# Altium PCB PCB1.PcbDoc
Units mil, origin at the board's own origin, x right, y up, seen from the top; angles counter-clockwise.
Board outline 10000 x 8000 mil, 2 copper layers (Top Layer, Bottom Layer); 30 components, 41 nets, 140 pads, 2 vias.
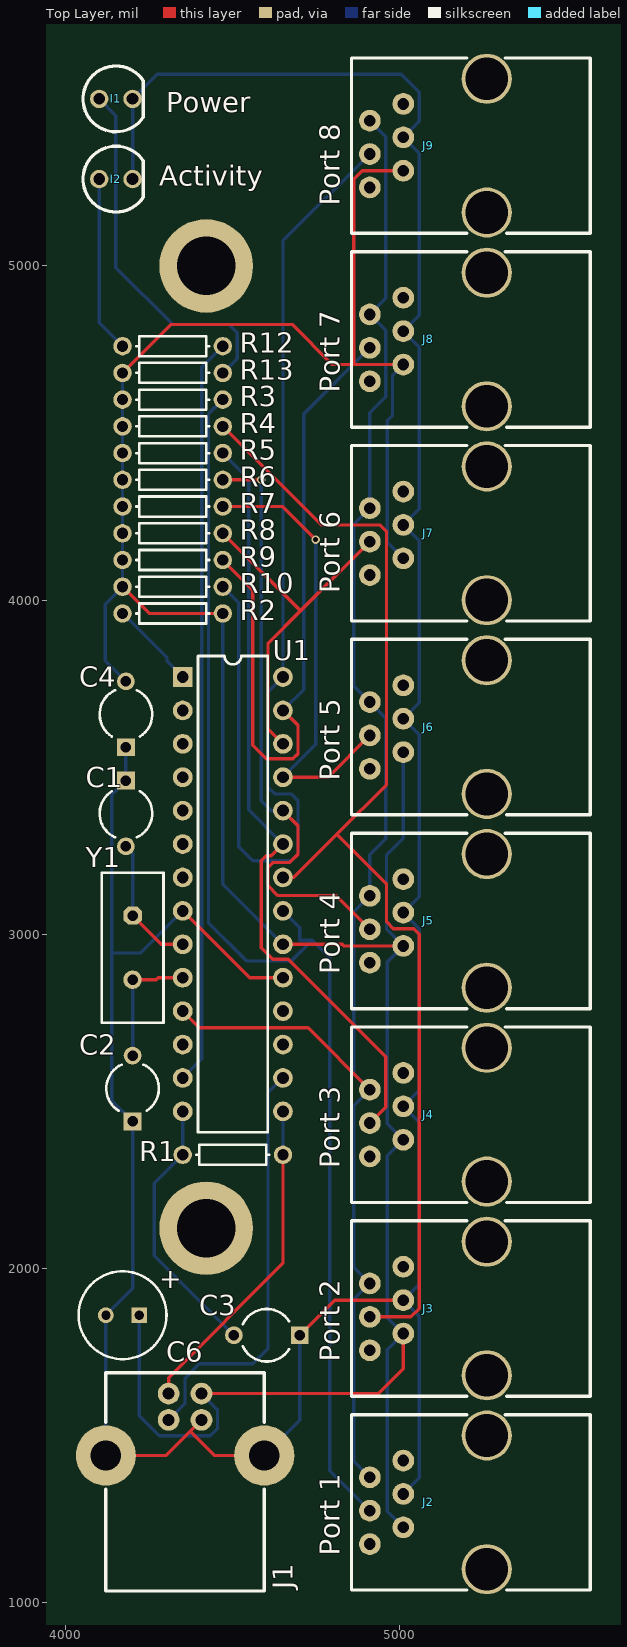
[diagram p0: Top Layer view]
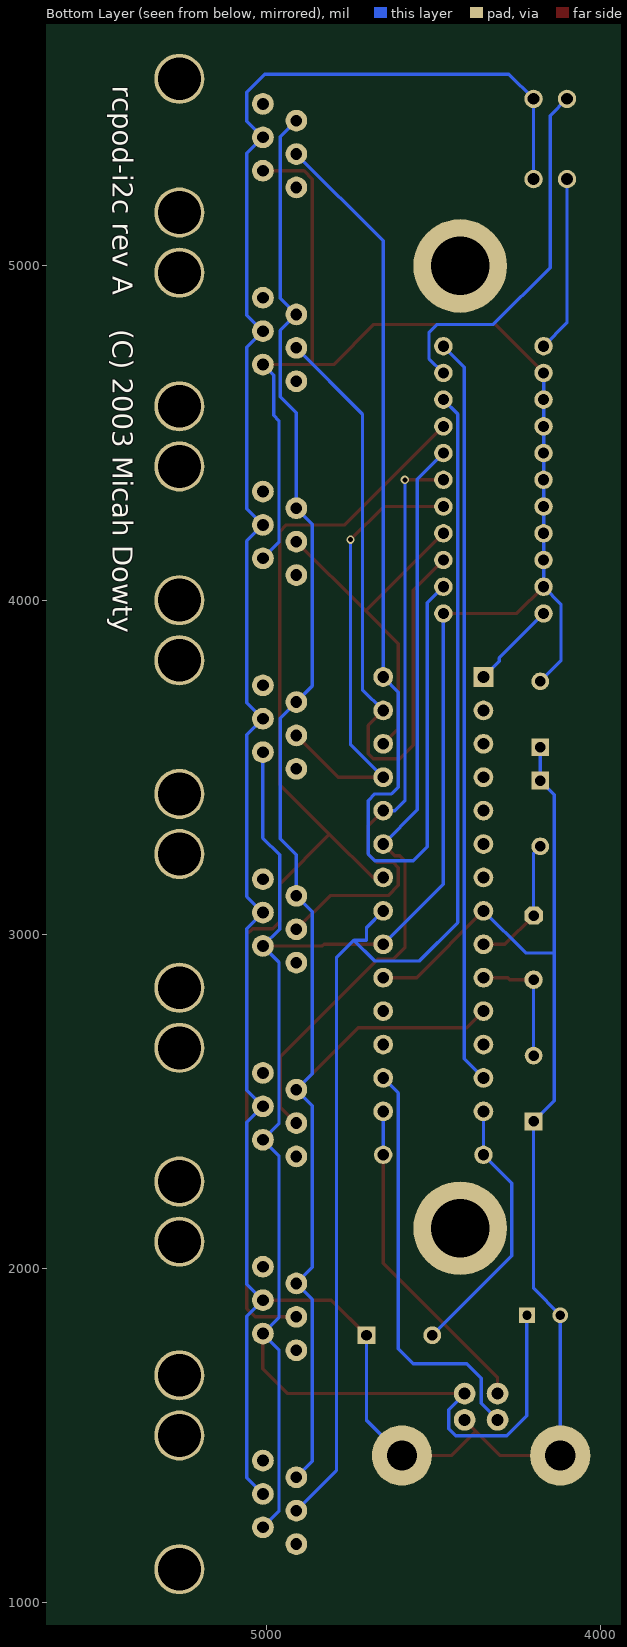
[diagram p1: Bottom Layer view, seen from below]

## Layer stack, top to bottom
Top Layer: signal copper 1.4
Dielectric: dielectric 12.6, FR-4, Dk 4.8
Bottom Layer: signal copper 1.4

## Board outline
0,0 10000,0 10000,8000 0,8000

## Design rules (kind name [scope] priority, off if disabled: settings)
Clearance [All] p1: gap=10
ComponentClearance [All] p1: gap=10 collisioncheckmode=0
HoleSize [All] p1: absolutevalues=TRUE maxlimit=200 minlimit=1 maxpercent=80.000 minpercent=20.000
PolygonConnect [All] p1: connectstyle=Relief reliefconductorwidth=10 reliefentries=4 polygonreliefangle="90 Angle"
RoomDefinition Sheet1 [InComponentClass('Sheet1')] p1: confinementstyle=ConfineIn formatcopy=TRUE outline 4000,1000 5600,1000 5600,5660 4000,5660
RoutingCorners [All] p1: cornerstyle=Round minsetback=100 maxsetback=100
RoutingLayers [All] p1: top layer=Horizontal bottom layer=Vertical
RoutingVias [All] p1: holewidth=15 width=25 viastyle="Through Hole" minholewidth=15 minwidth=25 maxholewidth=15 maxwidth=25
SolderMaskExpansion [All] p1: expansion=4
TestPointUsage [All] p1: valid=0 allowmultiple=FALSE
Testpoint [All] p1: side=15 testpointundercomponent=TRUE minsize=40 maxsize=100 preferedsize=60 minholesize=0 maxholesize=40 preferedholesize=32 testpointgrid=1 style=1023 order=1234567890
Width [All] p1: maxlimit=30 minlimit=10 preferedwidth=10 minimp=50.000000 maximp=50.000000 favimp=50.000000
14 further rules are at their usual default settings.

## Components (designator, comment, footprint, x,y, rotation, side; value= is the part's Value field where it differs from the comment)
C1 "Cap2" CAPR5-4X5 4180,3460 r270 top
C2 "Cap2" CAPR5-4X5 4200,2440 r90 top
C3 "" CAPR5-4X5 4700,1800 r180 top
C4 "" CAPR5-4X5 4180,3560 r90 top
C6 "Cap Pol1" CAP-EE-1 4320,1860 r0 top
I1 "Power" LED5MM 4100,5500 r0 top
I2 "Activity" LED5MM 4100,5260 r0 top
J1 "USB Type B" USB-TYPEB 4120,1440 r0 top
J2 "Port 1" RJ11 5260,1100 r90 top
J3 "Port 2" RJ11 5260,1680 r90 top
J4 "Port 3" RJ11 5260,2260 r90 top
J5 "Port 4" RJ11 5260,2840 r90 top
J6 "Port 5" RJ11 5260,3420 r90 top
J7 "Port 6" RJ11 5260,4000 r90 top
J8 "Port 7" RJ11 5260,4580 r90 top
J9 "Port 8" RJ11 5260,5160 r90 top
R1 "Res1" AXIAL-0.3 4500,2340 r0 top
R2 "Res1" AXIAL-0.3 4320,3960 r0 top
R3 "Res1" AXIAL-0.3 4320,4600 r0 top
R4 "Res1" AXIAL-0.3 4320,4520 r0 top
R5 "Res1" AXIAL-0.3 4320,4440 r0 top
R6 "Res1" AXIAL-0.3 4320,4360 r0 top
R7 "Res1" AXIAL-0.3 4320,4280 r0 top
R8 "Res1" AXIAL-0.3 4320,4200 r0 top
R9 "Res1" AXIAL-0.3 4320,4120 r0 top
R10 "Res1" AXIAL-0.3 4320,4040 r0 top
R12 "Res1" AXIAL-0.3 4320,4760 r180 top
R13 "Res1" AXIAL-0.3 4320,4680 r0 top
U1 "PIC16C745" DIP-28 4500,3120 r270 top
Y1 "6 MHz" BCY-W2/E4.7 4200,2960 r270 top

## Footprints (in the part's own frame and the unit in brackets; to place one, negate y for a bottom-side part, rotate by r counter-clockwise, add the part's x,y. Pads: shape width x height; smd on the part's side, far side on the other; paste and mask are expansions set on the pad)
AXIAL-0.3 [mm]
  round 1.4 hole 0.85: 1(-3.81,0) 2(3.81,0)
  silkscreen extent -2.77,-0.76 2.77,0.76
BCY-W2/E4.7 [mm]
  oct 1.4x1.4 hole 0.8: 1(-2.44,0)
  round 1.4 hole 0.8: 2(2.44,0)
  silkscreen extent -5.7,-2.35 5.7,2.35
CAP-EE-1 [mm]
  rect 1.2x1.2 hole 0.7: 1(-2.54,0)
  round 1.2 hole 0.7: 2(-5.08,0)
  silkscreen extent -7.15,-3.34 -0.47,3.34
CAPR5-4X5 [mm]
  rect 1.35x1.35 hole 0.8: 1(0,0)
  round 1.35 hole 0.8: 2(5,0)
  silkscreen extent 0.81,-2 4.32,2
DIP-28 [mm]
  rect 1.5x1.5 hole 0.9: 1(-16.51,-3.81)
  round 1.5 hole 0.9: 2(-13.97,-3.81) 3(-11.43,-3.81) 4(-8.89,-3.81) 5(-6.35,-3.81) 6(-3.81,-3.81) 7(-1.27,-3.81) 8(1.27,-3.81) 9(3.81,-3.81) 10(6.35,-3.81) 11(8.89,-3.81) 12(11.43,-3.81) 13(13.97,-3.81) 14(16.51,-3.81) 15(16.51,3.81) 16(13.97,3.81) 17(11.43,3.81) 18(8.89,3.81) 19(6.35,3.81) 20(3.81,3.81) 21(1.27,3.81) 22(-1.27,3.81) 23(-3.81,3.81) 24(-6.35,3.81) 25(-8.89,3.81) 26(-11.43,3.81) 27(-13.97,3.81) 28(-16.51,3.81)
  silkscreen extent -18.1,-2.65 18.1,2.65
LED5MM [mil]
  round 55 hole 35: 1(0,0) 2(100,0)
  silkscreen extent -48,-98 132,98
RJ11 [mil]
  round 150 hole 128: 0(0,0) 0(400,0)
  round 65 hole 35: 1(75,350) 2(125,250) 3(175,350) 4(225,250) 5(275,350) 6(325,250)
  silkscreen extent -63,-310 462,405
USB-TYPEB [mil]
  round 65 hole 36.22: 1(286.22,185.43) 2(187.8,185.43) 3(187.8,106.69) 4(286.22,106.69)
  round 180 hole 90.55: 5(0,0) 5(474.02,0)
  silkscreen extent 0,-406 474,248

## Part data
C1 C2: "Capacitor"
C3 C4: library part Cap2, "Capacitor"
C6: "Polarized Capacitor (Radial)"
I1 I2: library part LED0, "Typical INFRARED GaAs LED"
J1: "Header, 4-Pin"
J2 J3 J4 J5 J6 J7 J8 J9: library part "Header 6", "Header, 6-Pin"
R1 R2 R3 R4 R5 R6 R7 R8 R9 R10 R12 R13: "Resistor"
U1: "EPROM-Based 8-Bit CMOS Microcontroller with USB"
Y1: library part XTAL, "Crystal Oscillator"

## Free pads (board coordinates)
  round 280 hole 175: 0(4420,2120) 0(4420,5000)

## Via types
v1: diameter 25, hole 15, Top Layer to Bottom Layer, 2 vias

## Nets (pads, with @x,y where several pads share a name; then routed paths per layer and width w, separated by ;. In a path a pad name is that pad's centre, name@x,y a point inside that pad or via, vN(x,y) a via of type N, cw(c..) or ccw(c..) an arc to the next point about the centre after c; other vN are vias at no path point)
GND: C1.1 C2.1 C3.1 C4.1 C6.2 I1.2 I2.2 J1.4 J1.5 J2.4 J3.4 J4.4 J5.4 J6.4 J7.4 J8.4 J9.4 U1.8 U1.19 | length 9826.8
  Top Layer w10: J1.5@4120,1440 4299.53,1440 4372.87,1513.35 ; U1.8 4550,2870 U1.19 ; J1.4 4372.87,1513.35 ; J1.5@4594.02,1440 4446.22,1440 4372.87,1513.35 ; C3.1 4805,1905 J3.4
  Bottom Layer w10: J1.5@4120,1440 C6.2 4200,1940 C2.1 4138,2502 4138,2944 ; C4.1 C1.1 4138,3418 4138,2944 ; I2.2 I1.2 4274,5574 5004,5574 5058,5520 5058,5433 J9.4 5058,5337 5058,4853 J8.4 5058,4757 5058,4273 J7.4 5058,4177 5058,3693 J6.4 5058,3597 5058,3113 J5.4 5058,3017 5058,2533 J4.4 5058,2437 5058,1953 J3.4 5058,1857 5058,1373 J2.4 ; U1.8 4224,2944 4138,2944 ; J1.5@4594.02,1440 4700,1545.98 C3.1
NetC1_2: C1.2 U1.9 Y1.1 | length 401
  Top Layer w10: Y1.1 4286.06,2970 U1.9
  Bottom Layer w10: C1.2 4200,3243.15 Y1.1
NetC2_2: C2.2 U1.10 Y1.2 | length 379.6
  Top Layer w10: Y1.2 4271,2863.94 4277.06,2870 U1.10
  Bottom Layer w10: C2.2 Y1.2
NetC3_2: C3.2 R1.1 U1.14 | length 803.9
  Bottom Layer w10: U1.14 R1.1 4265,2255 4265,2038.15 C3.2
NetC14_1: 
NetC14_2: 
NetC15_1: 
NetC17_1: 
NetC17_2: 
NetC20_1: 
NetC20_2: 
NetC21_1: 
NetC21_2: 
NetC22_1: 
NetC22_2: 
NetC23_1: 
NetC23_2: 
NetI1_1: I1.1 R13.2 | length 1107.3
  Bottom Layer w10: I1.1 4150,5450 4150,4995 4320,4825 4488,4825 4513,4800 4513,4723 R13.2
NetI2_1: I2.1 R12.2 | length 529
  Bottom Layer w10: I2.1 4100,4830 R12.2
NetJ1_2: J1.2 R1.2 U1.15 | length 986.3
  Top Layer w10: J1.2 4307.8,1673 4650,2015.2 R1.2
  Bottom Layer w10: R1.2 U1.15
NetJ1_3: J1.3 U1.16 | length 1258.8
  Bottom Layer w10: J1.3 4357,1595.9 4357,1672 4400,1715 4560,1715 4605,1760 4605,2525 U1.16
NetL24_1: 
NetL25_1: 
NetL26_1: 
NetL27_1: 
NetR2_1: R2.1 U1.1 | length 264.6
  Bottom Layer w10: R2.1 4303,3827 4303,3817 U1.1
NetR6_2: 
NetR7_2: 
NetR10_2: 
NetR11_2: 
NetR12_1: R12.1 U1.13 | length 2239.7
  Bottom Layer w10: U1.13 4407,2627 4407,4697 R12.1
SCL: J2.5 J3.5 J4.5 J5.5 J6.5 J7.5 J8.5 J9.5 U1.11 | length 4995.7
  Top Layer w10: U1.11 4400,2720 4725,2720 J4.5
  Bottom Layer w10: J2.5 4862,1423 4862,1907 J3.5 4862,2003 4862,2487 J4.5 4862,2583 4862,3067 J5.5 4910,3238 4958,3286 4958,3647 J6.5 4862,3743 4862,4227 J7.5 4910,4560.5 4958,4608.5 4958,4807 J8.5 4958,4903 4958,5387 J9.5
SDA0: J2.3 R3.2 U1.21 | length 3891.5
  Bottom Layer w10: R3.2 4427,4557 4427,3035 4542,2920 4675,2920 4737.5,2982.5 ; U1.21 4700,3020 4700,2982.5 4737.5,2982.5 ; J2.3 4790,1395 4790,2930 4737.5,2982.5
SDA1: J3.3 R4.2 U1.22 | length 3518
  Top Layer w10: R4.2 4765,4225 4940,4225 4960,4205 4960,3448 4811,3299 ; U1.22 4682,3170 4811,3299 ; J3.3 5033,1855 5058,1880 5058,3000 5041,3017 4980,3017 4960,3037 4960,3150 4811,3299
SDA2: J4.3 R5.2 U1.23 | length 2316.6
  Top Layer w10: U1.23 4615,3235 4600,3235 4585,3220 4585,2960 4620,2925 4666,2925 4958,2633 4958,2483 J4.3
  Bottom Layer w10: R5.2 4548,4362 4548,3372 U1.23
SDA3: J5.3 R6.2 U1.24 | length 1820.6
  Top Layer w10: R6.2 v1(4585,4360) ; U1.24 4695,3325 4695,3240 4670,3215 4620.47,3215 4605,3199.53 4605,3146 4635,3116 4809,3116 J5.3
  Bottom Layer w10: v1(4585,4360) 4585,3400 4615,3370 U1.24
SDA4: J6.3 R7.2 U1.25 | length 1382.4
  Top Layer w10: R7.2 4649,4280 v1(4748,4181) ; U1.25 4785,3470 J6.3
  Bottom Layer w10: U1.25 4748,3568 v1(4748,4181)
SDA5: J7.3 R8.2 U1.26 | length 1078.8
  Top Layer w10: R8.2 4702.5,3967.5 ; U1.26 4605,3615 4605,3870 4702.5,3967.5 ; J7.3 4702.5,3967.5
SDA6: J8.3 R9.2 U1.27 | length 2091.4
  Top Layer w10: R9.2 4560,4030 4560,3565 4600,3525 4680,3525 4695,3540 4695,3625 U1.27
  Bottom Layer w10: U1.27 4712,3732 4712,4557 J8.3
SDA7: J9.3 R10.2 U1.28 | length 3288.5
  Bottom Layer w10: R10.2 4518,3992 4518,3262 4560,3220 4675,3220 4695,3240 4695,3400 4675,3420 4625,3420 4605,3440 4605,3725 U1.28 4650,5075 J9.3
VCC: C4.2 C6.1 J1.1 J2.2 J3.2 J4.2 J5.2 J6.2 J7.2 J8.2 J9.2 R2.2 R3.1 R4.1 R5.1 R6.1 R7.1 R8.1 R9.1 R10.1 R13.1 U1.20 | length 8927.2
  Top Layer w10: R10.1 4250,3960 R2.2 ; R13.1 4315,4825 4678,4825 4798,4705 4862,4705 ; J1.1 4935.43,1625.43 5010,1700 J3.2 ; U1.20 4827,2970 4832,2965 J5.2 ; J8.2 4862,4705 ; J9.2 4887,5285 4862,5260 4862,4705
  Bottom Layer w10: R13.1 R3.1 R4.1 R5.1 R6.1 R7.1 R8.1 R9.1 R10.1 4118,3988 4118,3818.85 C4.2 ; C6.1 4220,1559 4280,1499 4433,1499 4454,1520 4454,1577.66 J1.1 ; R2.2 4470,3150 U1.20 ; J2.2 4962,1273 4962,1757 J3.2 4962,1853 4962,2337 J4.2 4962,2433 4962,2917 J5.2 4960,3015 4960,3238 5010,3288 J6.2 ; J7.2 4962,4173 4962,4537 4978,4553 4978,4673 J8.2
pads on no net: J2.0 J2.1 J2.6 J3.0 J3.1 J3.6 J4.0 J4.1 J4.6 J5.0 J5.1 J5.6 J6.0 J6.1 J6.6 J7.0 J7.1 J7.6 J8.0 J8.1 J8.6 J9.0 J9.1 J9.6 U1.2 U1.3 U1.4 U1.5 U1.6 U1.7 U1.12 U1.17 U1.18

## Silkscreen, mask and mechanical layers (free items; w line width, h text height)
Bottom Overlay:
  text "rcpod-i2c rev A    (C) 2003 Micah Dowty" at 5460,5540 h60 r90
Mechanical 1:
  lines w10: 4000,1000 4000,5660 5600,5660 5600,1000 4000,1000

## Text inside footprints (layer, text, board x,y; h text height)
C6: Top Overlay "+" at 4280,1940 h59.06